# Altium PCB R61581_Pcb.PcbDoc
Units mil, origin at the board's own origin, x right, y up, seen from the top; angles counter-clockwise.
Board outline 3759.84 x 2165.35 mil, 2 copper layers (Top Layer, Bottom Layer); 20 components, 34 nets, 118 pads, 9 vias.
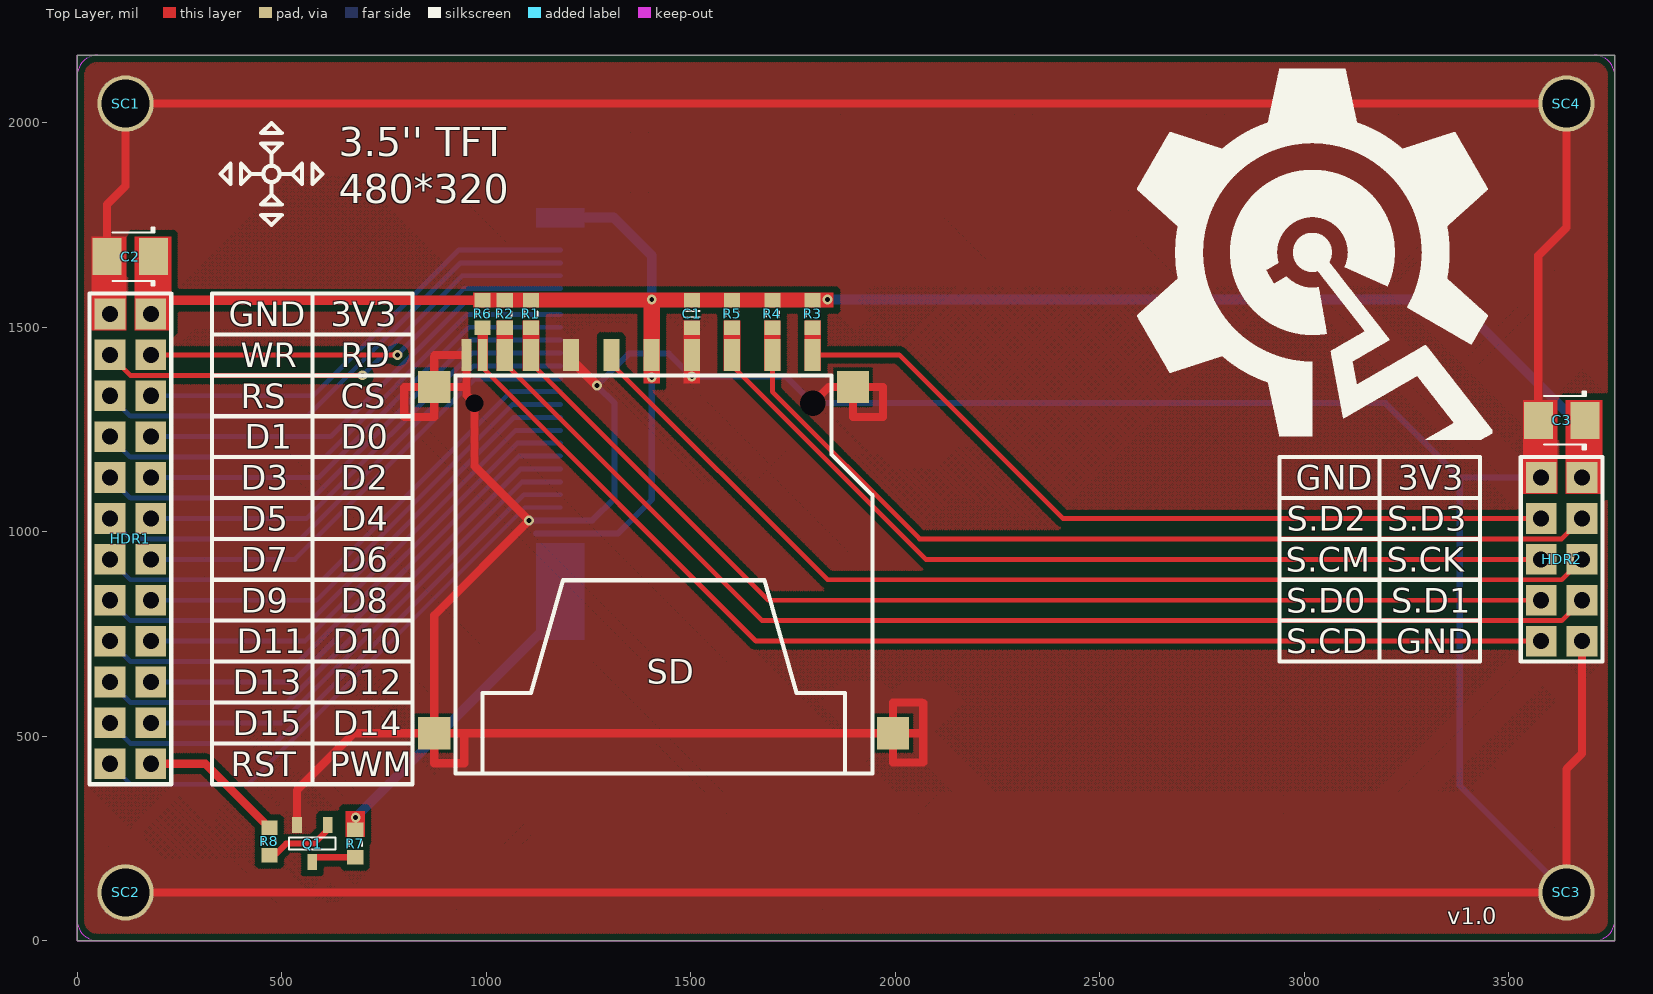
[diagram p0: Top Layer view]
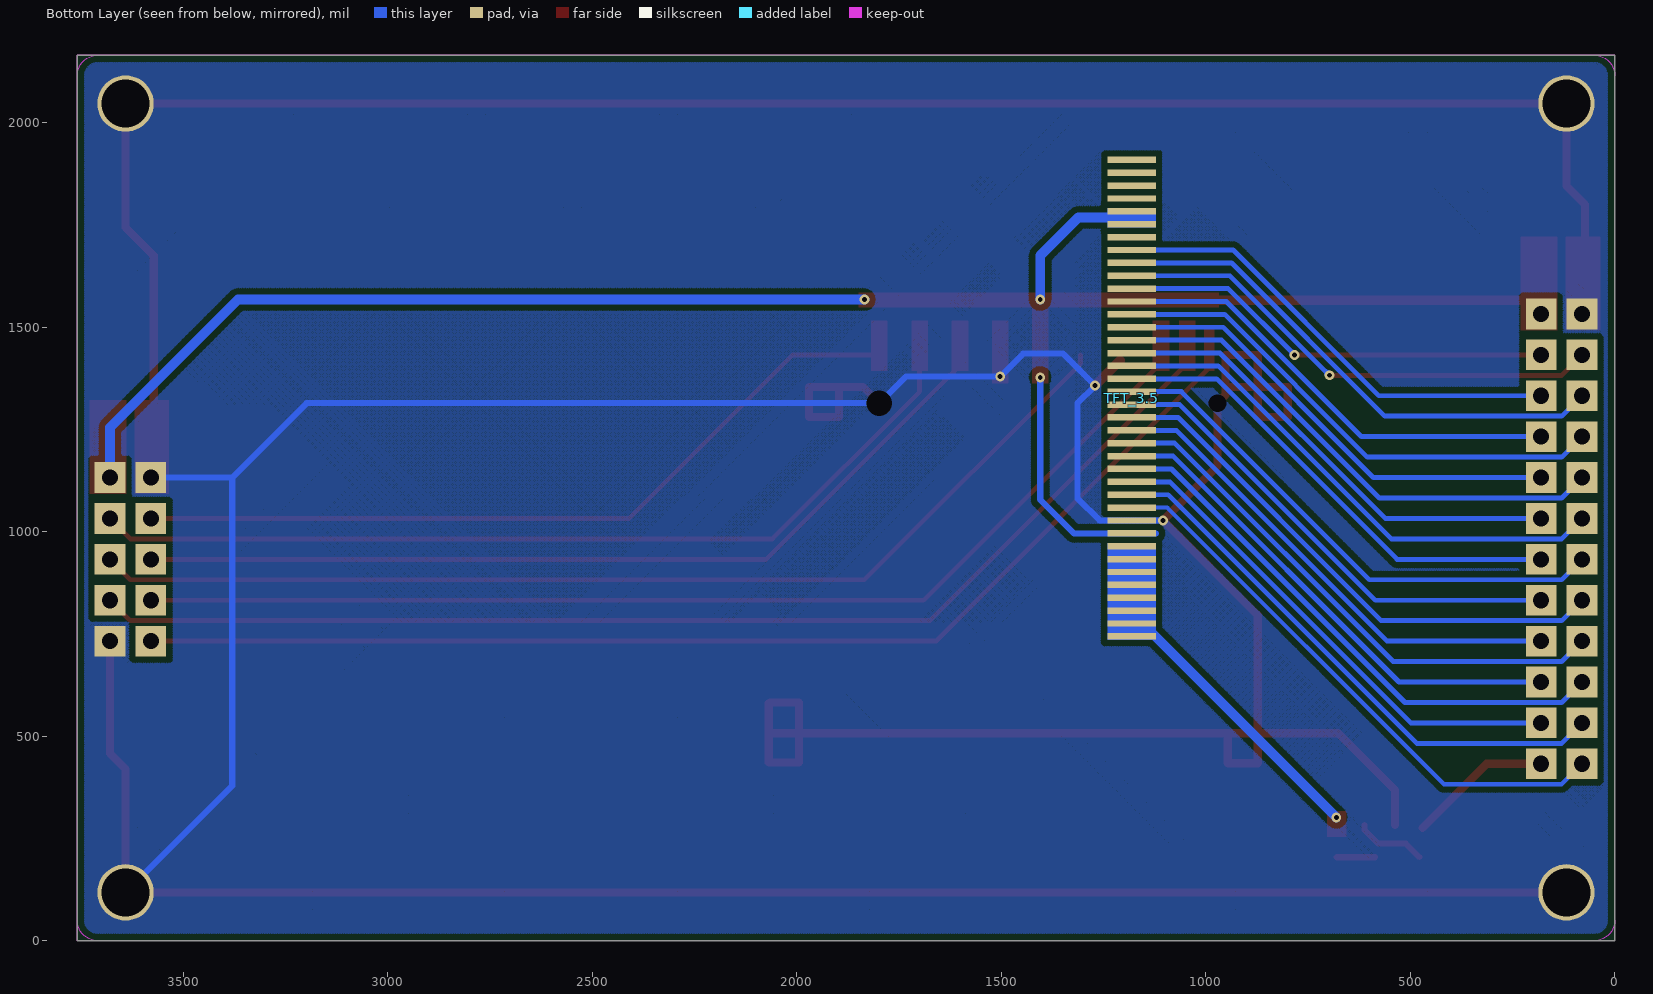
[diagram p1: Bottom Layer view, seen from below]

## Layer stack, top to bottom
Top Layer: signal copper 1.4
Dielectric: dielectric 12.6, FR-4, Dk 4.8
Bottom Layer: signal copper 1.4

## Board outline
0,2165.35 3759.84,2165.35 3759.84,0 0,0

## Design rules (kind name [scope] priority, off if disabled: settings)
Clearance ClearancePlane [InPolygon] p1: gap=15
Clearance [All] p2: gap=6
ComponentClearance [All] p1: gap=0 collisioncheckmode=3 verticalgap=0 showdistances=FALSE
HoleSize [All] p1: absolutevalues=TRUE maxlimit=120 minlimit=1 maxpercent=80.000 minpercent=20.000
HoleToHoleClearance [All] p1: gap=5 allowstackedmicrovias=TRUE
MinimumSolderMaskSliver [All] p1: minsoldermaskwidth=5
PlaneClearance [All] p1: clearance=0
PlaneConnect [All] p1: planeconnectstyle=Direct reliefexpansion=20 reliefentries=4 reliefconductorwidth=10 reliefairgap=10
PolygonConnect [All] p1: connectstyle=Direct reliefconductorwidth=10 reliefentries=4 polygonreliefangle="90 Angle" airgapwidth=10
RoutingVias [All] p1: holewidth=12 width=20 viastyle="Through Hole" minholewidth=12 minwidth=20 maxholewidth=30 maxwidth=60
SilkToSilkClearance [All] p1: silktosilkclearance=0
SilkToSolderMaskClearance [IsPad] p1: minsilkscreentomaskgap=2 clearancetoexposedcopper=TRUE
SolderMaskExpansion [All] p1: expansion=0
UnConnectedPin [All] p1:
Width [All] p1: maxlimit=30 minlimit=6 preferedwidth=10
20 further rules are at their usual default settings.

## Components (designator, comment, footprint, x,y, rotation, side; value= is the part's Value field where it differs from the comment)
C1 "Cap_0603" CAP_0603 1503.07,1532.68 r90 top
C2 "Cap_Tan_1210" CAP_TAN_B1210 129.92,1672.68 r180 top
C3 "Cap_Tan_1210" CAP_TAN_B1210 3629.92,1272.68 r180 top
HDR1 "HDR2X12_180F_2.54" HDR2X12_180F_2.54 79.92,1532.68 r270 top locked
HDR2 "HDR2X5_180F_2.54" HDR2X5_180F_2.54 3579.92,1132.68 r270 top
Q1 "BJT_NPN" SOT23-3 574.92,237.68 r270 top
R1 "Res_0603" RES_0603 1109.37,1532.68 r90 top
R2 "Res_0603" RES_0603 1045.39,1532.68 r90 top
R3 "Res_0603" RES_0603 1798.35,1532.68 r90 top
R4 "Res_0603" RES_0603 1699.92,1532.68 r90 top
R5 "Res_0603" RES_0603 1601.5,1532.68 r90 top
R6 "Res_0603" RES_0603 991.26,1532.68 r90 top
R7 "Res_0603" RES_0603 679.92,237.68 r90 top
R8 "Res_0603" RES_0603 469.92,242.68 r270 top
SC1 "M3" SCRREW_M3 118.11,2047.24 r0 top locked
SC2 "M3" SCRREW_M3 118.11,118.11 r0 top locked
SC3 "M3" SCRREW_M3 3641.73,118.11 r0 top locked
SC4 "M3" SCRREW_M3 3641.73,2047.24 r0 top locked
SD "SD_Card" SD_Card 1699.92,1432.68 r270 top locked
TFT_3.5 "TFT_3.5_R61581" TFT_3.5_R61581 3512.6,2154.72 r270 bottom locked

## Footprints (in the part's own frame and the unit in brackets; to place one, negate y for a bottom-side part, rotate by r counter-clockwise, add the part's x,y. Pads: shape width x height; smd on the part's side, far side on the other; paste and mask are expansions set on the pad)
CAP_0603 [mm] "Chip Capacitor, Body 1.6x0.8mm, 0603, IPC Medium Density"
  rect 0.9x1 smd: 1(-0.85,0) 2(0.85,0)
  Top Layer pour cut-out: -0.4,0.6 0.4,0.6 0.4,-0.6 -0.4,-0.6
  silkscreen extent -0.18,-0.48 0.18,0.48, body extent -0.85,-0.45 0.85,0.45, height 0.89
CAP_TAN_B1210 [mm] "Molded body capacitor, Body 3.5x2.8mm, 1210, IPC Nominal settings"
  rect 1.8x2.3 smd: 1(-1.45,0) 2(1.45,0)
  Top Layer pour cut-out: -0.508,1.27 0.508,1.27 0.508,-1.27 -0.508,-1.27
  silkscreen extent -1.5,-1.8 1.1,1.8, body extent -1.75,-1.4 1.75,1.4, height 2.1
HDR2X5_180F_2.54 [mm]
  rect 1.905x1.905 hole 1: 1(0,0) 2(0,2.54) 3(2.54,0) 4(2.54,2.54) 5(5.08,0) 6(5.08,2.54) 7(7.62,0) 8(7.62,2.54) 9(10.16,0) 10(10.16,2.54)
  silkscreen extent -1.27,-1.27 11.43,3.81, body extent -1.39,-1.23 11.56,3.77, height 8.5
HDR2X12_180F_2.54 [mm]
  rect 1.905x1.905 hole 1: 1(0,0) 2(0,2.54) 3(2.54,0) 4(2.54,2.54) 5(5.08,0) 6(5.08,2.54) 7(7.62,0) 8(7.62,2.54) 9(10.16,0) 10(10.16,2.54) 11(12.7,0) 12(12.7,2.54) 13(15.24,0) 14(15.24,2.54) 15(17.78,0) 16(17.78,2.54) 17(20.32,0) 18(20.32,2.54) 19(22.86,0) 20(22.86,2.54) 21(25.4,0) 22(25.4,2.54) 23(27.94,0) 24(27.94,2.54)
  silkscreen extent -1.27,-1.27 29.21,3.81, body extent -1.39,-1.23 29.34,3.77, height 8.5
RES_0603 [mm]
  rect 0.9x1 smd: 1(-0.85,0) 2(0.85,0)
  Top Layer pour cut-out: -0.4,0.6 0.4,0.6 0.4,-0.6 -0.4,-0.6
  silkscreen extent -0.15,-0.41 0.15,0.41, body extent -0.87,-0.47 0.88,0.48, height 0.54
SCRREW_M3 [mm]
  round 3.5 hole 3: 0(0,0)
SD_Card [mm]
  rect 2x1 smd: 1(0,0) 2(0,-2.5) 3(0,-5) 4(0,-7.5) 5(0,-10) 6(0,-12.5) 7(0,-15) 8(0,-16.625) 9(0,2.5)
  rect 2x2 smd: 3(2,5) 3(2,-21) 3(23.5,7.5) 3(23.5,-21)
  round 1.5 hole 1.6: 3(3,2.5)
  round 1 hole 1.1: 3(3,-18.5)
  rect 2x0.6 smd: 10(0,-18) 11(0,-19)
  silkscreen extent 1.27,-19.68 26,6.22, body extent -0.2,-20.85 37.08,7.12, height 3.32
SOT23-3 [mm] "SOT23, 3 pin"
  rect 1x0.6 smd: 1(-1.15,0.95) 2(-1.15,-0.95) 3(1.15,0)
  silkscreen extent -0.38,-1.45 0.38,1.45, body extent -1.4,-1.45 1.4,1.45, height 1.29
TFT_3.5_R61581 [mm]
  rect 0.4x3 smd: 1(6.227,59.21) 2(7.027,59.21) 3(7.827,59.21) 4(8.627,59.21) 5(9.427,59.21) 6(10.227,59.21) 7(11.027,59.21) 8(11.827,59.21) 9(12.627,59.21) 10(13.427,59.21) 11(14.227,59.21) 12(15.027,59.21) 13(15.827,59.21) 14(16.627,59.21) 15(17.427,59.21) 16(18.227,59.21) 17(19.027,59.21) 18(19.827,59.21) 19(20.627,59.21) 20(21.427,59.21) 21(22.227,59.21) 22(23.027,59.21) 23(23.827,59.21) 24(24.627,59.21) 25(25.427,59.21) 26(26.227,59.21) 27(27.027,59.21) 28(27.827,59.21) 29(28.627,59.21) 30(29.427,59.21) 31(30.227,59.21) 32(31.027,59.21) 33(31.827,59.21) 34(32.627,59.21) 35(33.427,59.21) 36(34.227,59.21) 37(35.027,59.21) 38(35.827,59.21)

## Part data
C1 C2 C3: "Capacitor"
HDR1 HDR2: "Header"
Q1: "Transistor"
R1 R2 R3 R4 R5 R6 R7 R8: "Resistor"
SC1 SC2 SC3 SC4: library part Screw_M3, "Screw"
SD: "SD"
TFT_3.5: "Module"

## Via types
v1: diameter 24, hole 12, Top Layer to Bottom Layer, 9 vias

## Nets (pads, with @x,y where several pads share a name; then routed paths per layer and width w, separated by ;. In a path a pad name is that pad's centre, name@x,y a point inside that pad or via, vN(x,y) a via of type N, cw(c..) or ccw(c..) an arc to the next point about the centre after c; other vN are vias at no path point)
3V3: C1.2 C2.1 C3.1 HDR1.2 HDR2.2 R1.2 R2.2 R3.2 R4.2 R5.2 R6.2 SD.4 TFT_3.5.5 TFT_3.5.6 TFT_3.5.30 | length 3887.3
  Top Layer w24: HDR1.2 179.92,1552.68 193.39,1566.14 R6.2
  Bottom Layer w15: 1121.92,996.17 1322.42,996.17 1404.92,1078.68 v1(1404.92,1377.68)
  Bottom Layer w24: 1213.92,1768.68 1311.92,1768.68 1404.92,1675.68 v1(1404.92,1567.68) ; v1(1834.92,1567.68) 3366.92,1567.68 3679.92,1254.68 HDR2.2
CS: HDR1.6 TFT_3.5.8 | length 1149.2
  Bottom Layer w12: HDR1.6 576.92,1332.68 933.33,1689.09 TFT_3.5.8
D0: HDR1.8 TFT_3.5.12 | length 1138.4
  Bottom Layer w12: HDR1.8 619.36,1232.68 949.78,1563.1 TFT_3.5.12
D1: HDR1.7 TFT_3.5.13 | length 1266.8
  Bottom Layer w12: HDR1.7 129.92,1182.68 604.81,1182.68 953.74,1531.61 TFT_3.5.13
D2: HDR1.10 TFT_3.5.14 | length 1153.8
  Bottom Layer w12: HDR1.10 590.27,1132.68 957.7,1500.11 TFT_3.5.14
D3: HDR1.9 TFT_3.5.15 | length 1282.1
  Bottom Layer w12: HDR1.9 129.92,1082.68 575.72,1082.68 961.66,1468.61 TFT_3.5.15
D4: HDR1.12 TFT_3.5.16 | length 1169.1
  Bottom Layer w12: HDR1.12 561.18,1032.68 965.62,1437.12 TFT_3.5.16
D5: HDR1.11 TFT_3.5.17 | length 1297.5
  Bottom Layer w12: HDR1.11 129.92,982.68 546.64,982.68 969.58,1405.62 TFT_3.5.17
D6: HDR1.14 TFT_3.5.18 | length 1184.4
  Bottom Layer w12: HDR1.14 532.09,932.68 973.54,1374.12 TFT_3.5.18
D7: HDR1.13 TFT_3.5.19 | length 1312.8
  Bottom Layer w12: HDR1.13 129.92,882.68 599.92,882.68 1059.87,1342.63 TFT_3.5.19
D8: HDR1.16 TFT_3.5.20 | length 1199.8
  Bottom Layer w12: HDR1.16 585.69,832.68 1064.14,1311.13 TFT_3.5.20
D9: HDR1.15 TFT_3.5.21 | length 1328.1
  Bottom Layer w12: HDR1.15 129.92,782.68 571.14,782.68 1068.1,1279.64 TFT_3.5.21
D10: HDR1.18 TFT_3.5.22 | length 1215.1
  Bottom Layer w12: HDR1.18 556.6,732.68 1072.06,1248.14 TFT_3.5.22
D11: HDR1.17 TFT_3.5.23 | length 1343.5
  Bottom Layer w12: HDR1.17 129.92,682.68 542.06,682.68 1076.02,1216.64 TFT_3.5.23
D12: HDR1.20 TFT_3.5.24 | length 1230.4
  Bottom Layer w12: HDR1.20 527.51,632.68 1079.98,1185.15 TFT_3.5.24
D13: HDR1.19 TFT_3.5.25 | length 1358.8
  Bottom Layer w12: HDR1.19 129.92,582.68 512.97,582.68 1083.94,1153.65 TFT_3.5.25
D14: HDR1.22 TFT_3.5.26 | length 1245.7
  Bottom Layer w12: HDR1.22 498.42,532.68 1087.9,1122.16 TFT_3.5.26
D15: HDR1.21 TFT_3.5.27 | length 1383.6
  Bottom Layer w10: HDR1.21 HDR1.21@89.36,532.68
  Bottom Layer w12: HDR1.21 129.92,482.68 483.88,482.68 1091.86,1090.66 TFT_3.5.27
GND: C1.1 C2.2 C3.2 HDR1.1 HDR2.1 HDR2.10 Q1.2 SC1.0 SC2.0 SC3.0 SC4.0 SD.3 SD.6 SD.11 TFT_3.5.29 | length 17415.3
  Top Layer w20: C2.2 72.83,1800.59 118.11,1845.87 SC1.0 SC4.0 3641.73,1744.49 3572.83,1675.59 C3.2 ; SC2.0 SC3.0 3641.73,419.49 3679.92,457.68 HDR2.10 ; Q1.2 537.52,368.28 676.72,507.48 SD.3@873.15,507.48 ; 873.15,1427.39 SD.3@873.15,1353.94 ; 873.87,1432.68 SD.11@947.33,1432.68 ; 946.6,507.48 946.6,434.02 873.15,434.02 SD.3@873.15,507.48 ; 950.63,1353.94 SD.3@873.15,1353.94 ; SD.11 951.89,1334.25 971.57,1314.57 971.57,1161.02 v1(1104.92,1027.68) 873.15,795.9 SD.3@873.15,507.48 ; SD.3@1798.35,1314.57 1837.72,1353.94 SD.3@1896.77,1353.94 ; 2064.16,582.68 1995.2,582.68 SD.3@1995.2,507.48 ; 2068.65,580.93 2068.65,507.48 ; SD.3@873.15,507.48 SD.3@1995.2,507.48 ; SD.3@873.15,1353.94 799.69,1353.94 799.69,1280.48 873.15,1280.48 SD.3@873.15,1353.94 ; SD.3@1896.77,1353.94 1896.77,1280.48 1970.23,1280.48 1970.23,1353.94 SD.3@1896.77,1353.94 ; SD.3@1995.2,507.48 1995.2,435.82 2068.65,435.82 2068.65,507.48 ; SD.3@1995.2,507.48 2068.65,507.48
  Top Layer w24: SD.6@1209.79,1418.8 v1(1270.92,1357.68)
  Bottom Layer w15: v1@1104.93,1027.67 TFT_3.5.29 1259.91,1027.67 1313.92,1081.68 1313.92,1314.66 1270.91,1357.67 1348.92,1435.68 1446.92,1435.68 v1(1502.92,1379.68) 1733.24,1379.68 1798.35,1314.57 3199.03,1314.57 3380.92,1132.68 ; HDR2.1 3380.92,1132.68 ; SC3.0 3380.92,378.92 3380.92,1132.68
LEDK: R7.2 TFT_3.5.31 TFT_3.5.32 TFT_3.5.33 TFT_3.5.34 TFT_3.5.35 TFT_3.5.36 TFT_3.5.37 TFT_3.5.38 | length 670.4
  Bottom Layer w24: v1(680.92,301.68) TFT_3.5.37@1154.94,775.7
LIG: HDR1.24 R8.1 | length 354.8
  Top Layer w20: HDR1.24 313.39,432.68 R8.1
NetQ1_1: Q1.1 R8.2 | length 173.8
  Top Layer w15: R8.2@477.92,204.68 510.92,237.68 578.92,237.68 612.32,271.08 Q1.1
NetQ1_3: Q1.3 R7.1 | length 93.2
  Top Layer w15: 586.73,204.21 R7.1
RD: HDR1.4 TFT_3.5.11 | length 1114
  Top Layer w12: HDR1.4 v1@782.92,1432.68 ; 768.18,1432.68 cw(c768.18,1417.56) v1@778.86,1428.25 ; 769.06,1432.68 ccw(c769.06,1446.54) v1@778.86,1436.74
  Bottom Layer w12: v1(783.1,1432.49) 945.21,1594.6 TFT_3.5.11 ; v1@783.1,1438.49 ccw(c783.1,1452.98) 793.35,1442.74 ccw(c803.59,1432.49) v1@789.1,1432.49
RS: HDR1.5 TFT_3.5.9 | length 1277.6
  Bottom Layer w12: HDR1.5 129.92,1282.68 562.38,1282.68 937.29,1657.59 TFT_3.5.9
RST: HDR1.23 TFT_3.5.28 | length 1402.5
  Bottom Layer w10: HDR1.23 129.92,382.68 417.92,382.68 1094.41,1059.16 TFT_3.5.28
SD_CD: HDR2.9 R6.1 SD.10 | length 2897
  Top Layer w12: SD.10 991.26,1401.34 1659.92,732.68 HDR2.9
SD_CM: HDR2.5 R5.1 SD.2 | length 2201.1
  Top Layer w12: SD.2 1601.5,1406.1 2074.92,932.68 HDR2.5
SD_D0: HDR2.7 R1.1 SD.7 | length 2730.5
  Top Layer w12: SD.7 1109.37,1413.23 1689.92,832.68 HDR2.7
SD_D1: HDR2.8 R2.1 SD.8 | length 2936.5
  Top Layer w12: SD.8 1045.39,1412.2 1674.92,782.68 3629.92,782.68 HDR2.8
SD_D2: HDR2.3 R3.1 SD.9 | length 1947.3
  Top Layer w12: SD.9 2009.92,1432.68 2409.92,1032.68 HDR2.3
SD_D3: HDR2.4 R4.1 SD.1 | length 2239.8
  Top Layer w12: SD.1 1699.92,1342.68 2059.92,982.68 3629.92,982.68 HDR2.4
SD_SCK: HDR2.6 SD.5 | length 2634.7
  Top Layer w12: SD.5 1306.22,1411.38 1834.92,882.68 3629.92,882.68 HDR2.6
WR: HDR1.3 TFT_3.5.10 | length 1268.6
  Top Layer w12: HDR1.3 129.92,1382.68 v1(697.88,1382.72) ; 683.28,1382.68 ccw(c683.28,1397.31) v1@693.63,1386.96 ; 683.5,1382.68 cw(c683.5,1368.34) v1@693.63,1378.48
  Bottom Layer w12: v1(697.88,1382.72) 941.25,1626.09 TFT_3.5.10 ; v1@697.88,1388.72 ccw(c697.88,1403.21) 708.12,1392.96 ccw(c718.36,1382.72) v1@703.88,1382.72
pads on no net: TFT_3.5.1 TFT_3.5.2 TFT_3.5.3 TFT_3.5.4 TFT_3.5.7

## Polygon pours and split planes (outlines as drawn)
GND on Bottom Layer "Top Layer-No Net" (hatched 45Degree grid 4 track 4, remove dead copper, pour order 4): 0,2165.35 3759.84,2165.35 3759.84,0 0,0
GND on Top Layer "Top Layer-No Net" (hatched 45Degree grid 4 track 4, remove dead copper, pour order 5): 0,2165.35 3759.84,2165.35 3759.84,0 0,0

## Keep-outs
Keep-Out Layer:
  lines w2: 0,50 ccw(c50,50) 50,0 ; 0,2115.35 cw(c50,2115.35) 50,2165.35 ; 3709.84,0 ccw(c3709.84,50) 3759.84,50 ; 3709.84,2165.35 cw(c3709.84,2115.35) 3759.84,2115.35 ; 0,0 3759.84,0 3759.84,2165.35 0,2165.35 0,0

## Other copper
Top Layer:
  rectangle net LEDK: 656.3,253.43 703.54,317.68
  rectangle net 3V3: 1384.92,1362.68 1424.92,1581.68
  rectangle net 3V3: 967.64,1548.43 1849.92,1584.68
  rectangle net SD_D2: 1777.92,1392.68 1818.92,1516.93
  rectangle net SD_D3: 1679.92,1392.68 1719.92,1516.93
  rectangle net SD_CM: 1580.92,1392.68 1621.92,1516.93
  rectangle net GND: 1482.92,1362.68 1522.92,1516.93
  rectangle net SD_D0: 1088.92,1392.68 1129.92,1516.93
  rectangle net SD_D1: 1024.92,1392.68 1065.92,1516.93
  rectangle net SD_CD: 978.92,1392.68 1003.92,1499.21
  rectangle net GND: 3534.92,1092.63 3619.92,1322.63
  rectangle net 3V3: 3639.92,1092.63 3729.92,1322.63
  rectangle net 3V3: 139.92,1492.68 229.92,1722.68
  rectangle net GND: 34.92,1492.68 119.92,1722.68
  pour cut-out: 29.92,1581.71 229.92,1581.71 229.92,382.68 29.92,382.68
  pour cut-out: 3529.92,1182.68 3729.92,1182.68 3729.92,682.68 3529.92,682.68
  pour cut-out: 2403.32,1019.87 3534.92,1019.87 3534.92,993.68 2403.32,993.68
  pour cut-out: 2067.92,919.87 3532.92,919.87 3532.92,893.68 2067.92,893.68
  pour cut-out: 1825.1,869.87 3644.92,869.87 3644.92,843.68 1825.1,843.68
  pour cut-out: 823.31,1403.68 923.31,1403.68 923.31,1303.68 823.31,1303.68
  pour cut-out: 1847.31,1403.68 1946.31,1403.68 1946.31,1303.68 1847.31,1303.68
  pour cut-out: 823.31,557.68 923.31,557.68 923.31,457.68 823.31,457.68
  pour cut-out: 1945.31,557.68 2045.31,557.68 2045.31,457.68 1945.31,457.68
Bottom Layer:
  rectangle net 3V3: 1121.92,1743.68 1240.92,1791.68
  rectangle net LEDK: 1121.92,735.68 1240.92,972.68

## Silkscreen, mask and mechanical layers (free items; w line width, h text height)
Top Overlay:
  drawing of 6225 lines, arcs and shapes, not listed
  text "3.5'' TFT" at 640,1895 h120
  text "480*320" at 640,1780 h120
  text "GND" at 369.92,1502.63 h60
  text "3V3" at 619.92,1502.63 h60
  text "WR" at 399.92,1402.63 h60
  text "RD" at 644.92,1402.63 h60
  text "RS" at 399.92,1302.63 h60
  text "CS" at 644.92,1302.63 h60
  text "D1" at 409.92,1202.63 h60
  text "D0" at 644.92,1202.63 h60
  text "D3" at 399.92,1102.63 h60
  text "D2" at 644.92,1102.63 h60
  text "GND" at 2979.92,1102.63 h60
  text "3V3" at 3228.92,1102.63 h60
  text "D5" at 399.92,1002.63 h60
  text "D4" at 644.92,1002.63 h60
  text "S.D2" at 2957.92,1002.63 h60
  text "S.D3" at 3202.92,1002.63 h60
  text "D7" at 399.92,902.63 h60
  text "D6" at 644.92,902.63 h60
  text "S.CM" at 2954.92,902.63 h60
  text "S.CK" at 3201.92,902.63 h60
  text "D9" at 399.92,802.63 h60
  text "D8" at 644.92,802.63 h60
  text "S.D0" at 2955.92,802.63 h60
  text "S.D1" at 3212.92,802.63 h60
  text "D11" at 389.92,702.63 h60
  text "D10" at 624.92,702.63 h60
  text "S.CD" at 2955.92,702.63 h60
  text "GND" at 3224.92,702.63 h60
  text "D13" at 379.92,602.63 h60
  text "D12" at 624.92,602.63 h60
  text "D15" at 379.92,502.63 h60
  text "D14" at 624.92,502.63 h60
  text "RST" at 375.92,402.63 h60
  text "PWM" at 616.92,402.63 h60
  text "v1.0" at 3350,40 h40
Mechanical 1:
  the board outline again, w0
Mechanical 13:
  circle w1: c118.11,2047.24 r118.11
  circle w1: c118.11,118.11 r118.11
  circle w1: c3641.73,118.11 r118.11
  circle w1: c3641.73,2047.24 r118.11

## Dimensions
247.24,2154.72 to 3512.6,2154.72 on Mechanical 13
0,2165.35 to 3759.84,2165.35 on Mechanical 13
0,2165.35 to 0,0 on Mechanical 13